# Altium PCB СФ МЭИ ЛБ ПЭ2-18 11.03.04 08.PcbDoc
Units mm, origin at the board's own origin, x right, y up, seen from the top; angles counter-clockwise.
Board outline 57.42 x 32.22 mm, 2 copper layers (Top Layer, Bottom Layer); 20 components, 12 nets, 43 pads, 3 vias.
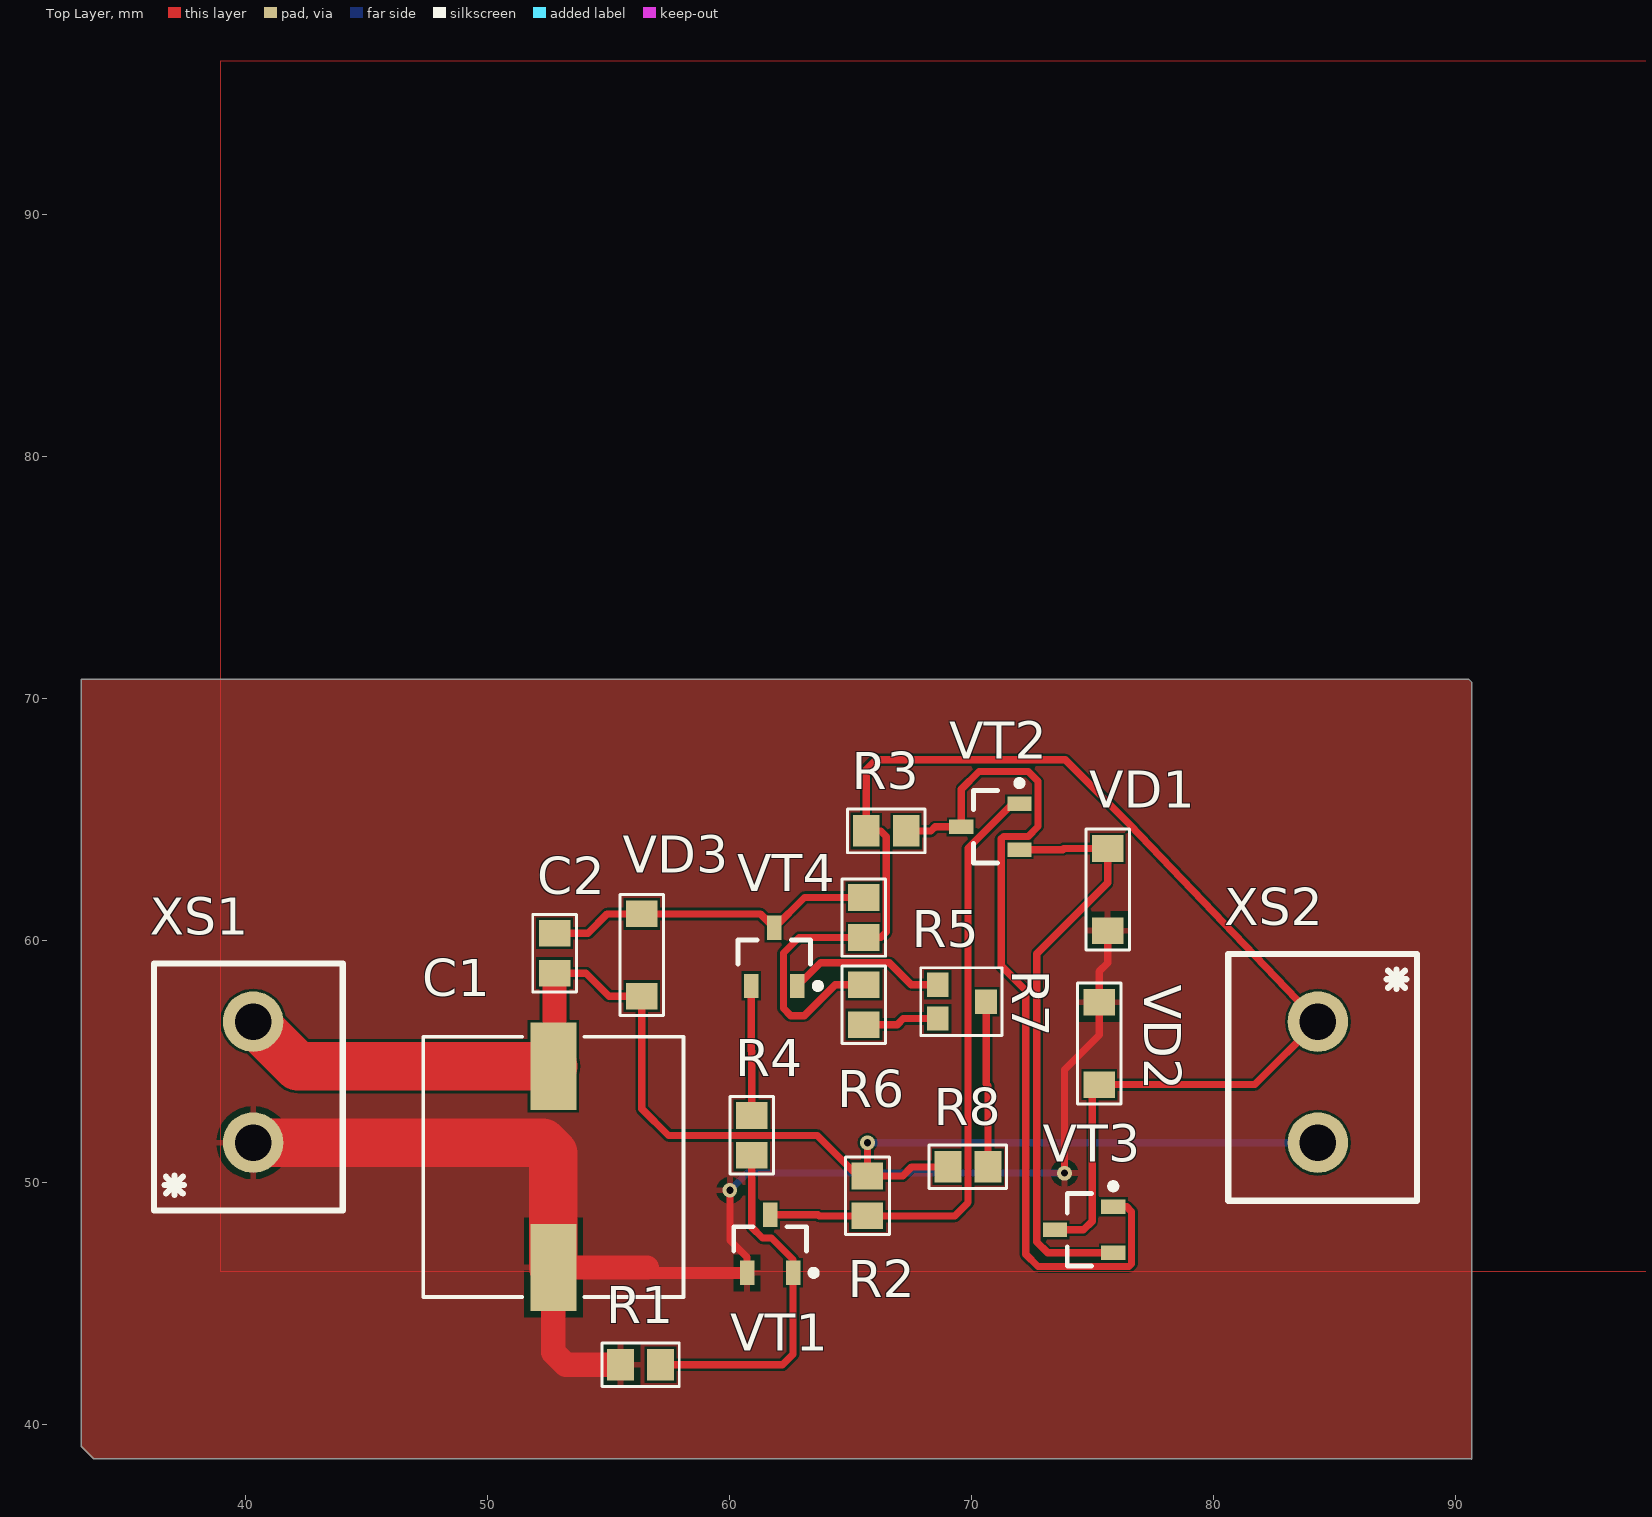
[diagram p0: Top Layer view]
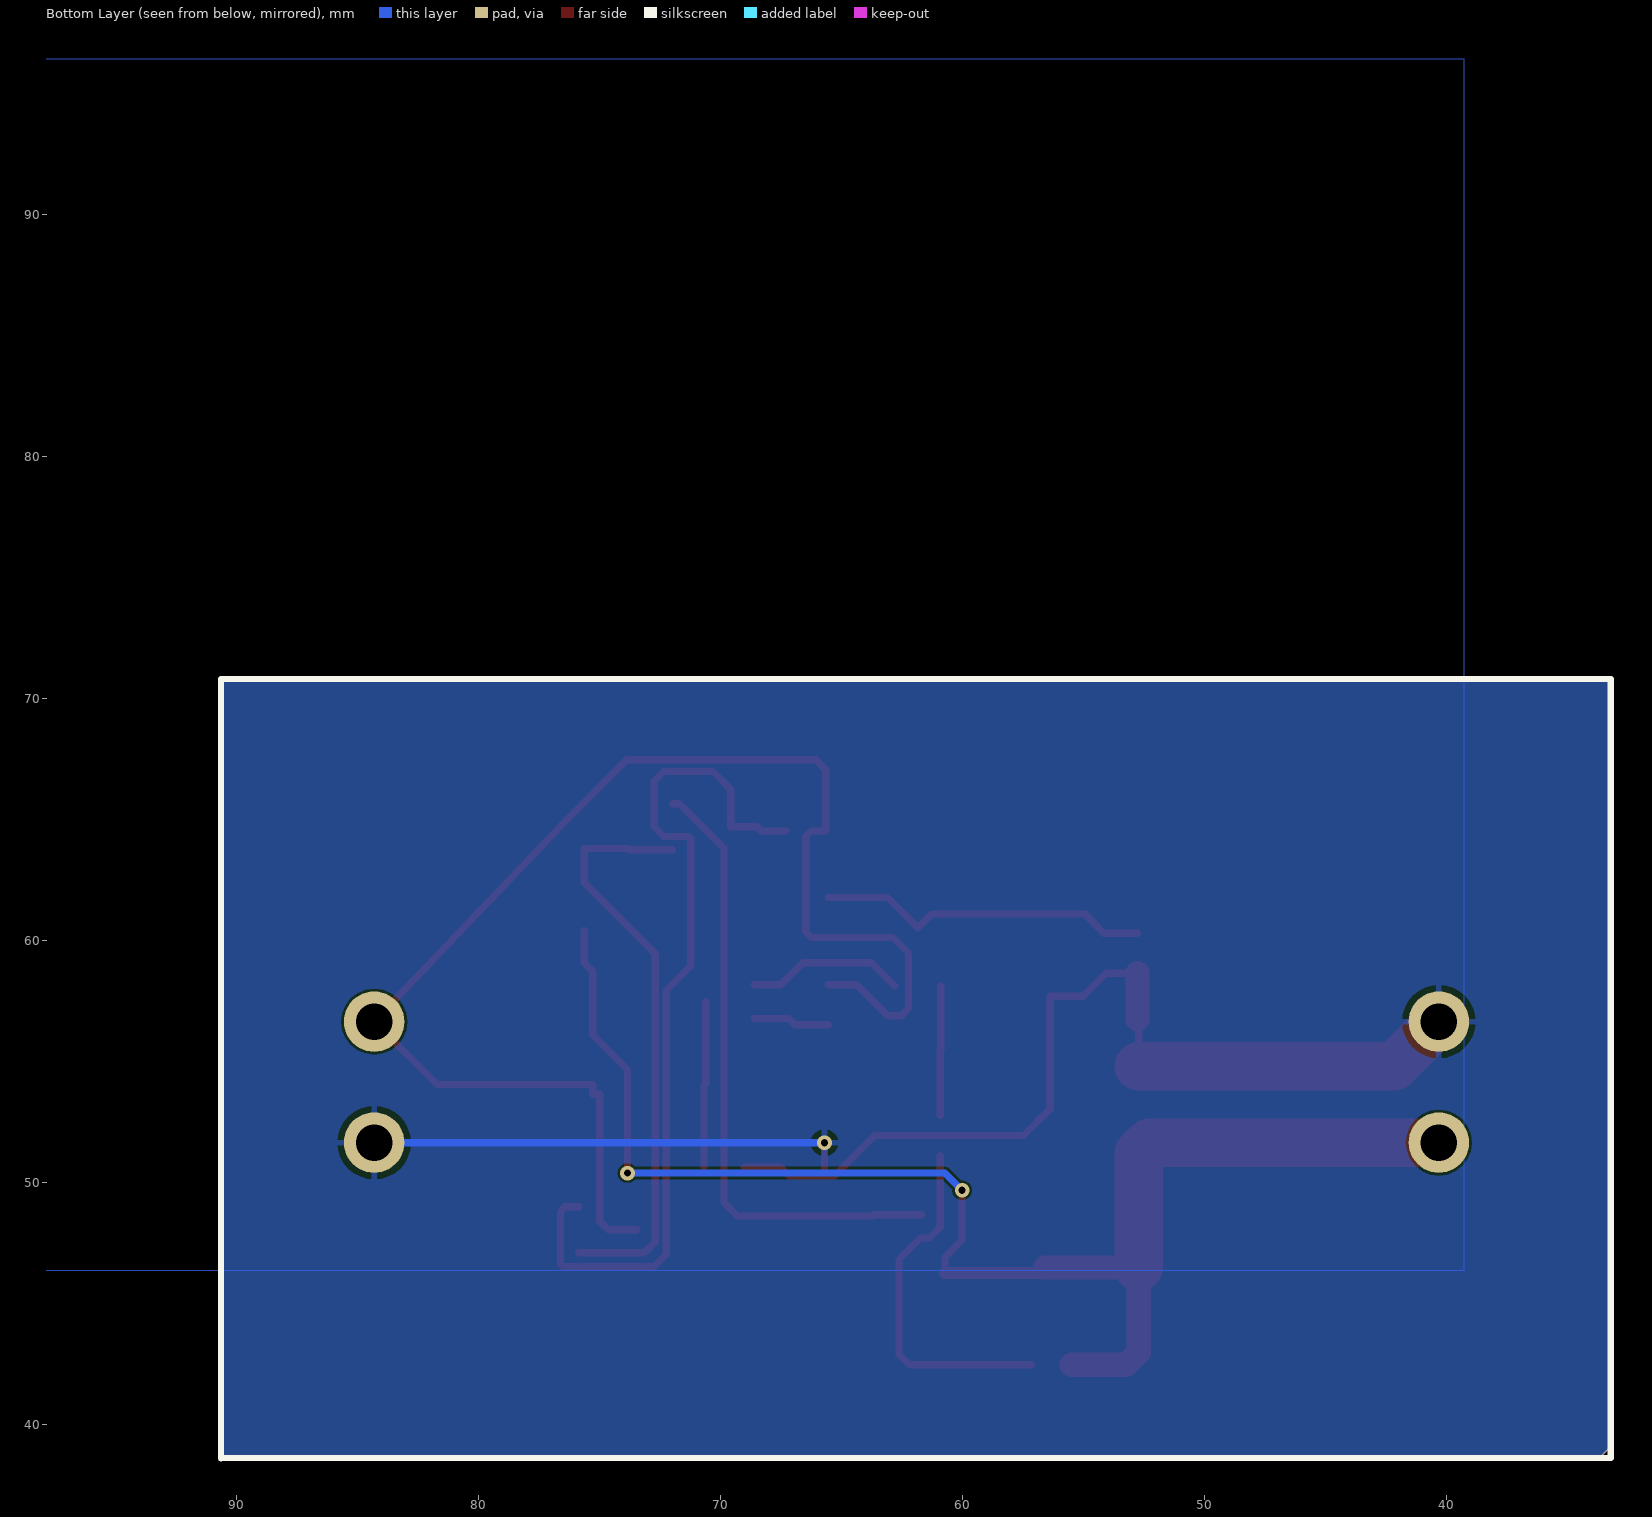
[diagram p1: Bottom Layer view, seen from below]

## Layer stack, top to bottom
Top Solder: solder mask 0.0102, Solder Resist, Dk 3.5
Top Layer: signal copper 0.0356
Dielectric 1: dielectric 0.32, FR-4, Dk 4.8
Bottom Layer: signal copper 0.0356
Bottom Solder: solder mask 0.0102, Solder Resist, Dk 3.5

## Board outline
33.725,38.6 33.225,39.1 33.225,70.8 90.525,70.8 90.65,70.675 90.65,38.575 90.625,38.6

## Design rules (kind name [scope] priority, off if disabled: settings)
Clearance [All] p1: gap=0.1 ignorepadtopadclearanceinfootprint=FALSE except(0: Arc-Hole Track-Hole SMDPad-Hole THPad-Hole Via-Hole Fill-Hole Poly-Hole Region-Hole Text-Hole)
MinimumAnnularRing MinimumAnnularRing_1 [All] p1: minimumring=0.254
MinimumAnnularRing [All] p2: minimumring=0.254
PolygonConnect [All] p1: connectstyle=Relief reliefconductorwidth=0.254 reliefentries=4 polygonreliefangle="90 Angle" airgapwidth=0.254
RoutingVias [All] p1: holewidth=0.3 width=0.6 viastyle="Through Hole" minholewidth=0.4 minwidth=0.6 maxholewidth=0.4 maxwidth=0.6
SolderMaskExpansion [All] p1: expansion=0.102 istentingtop=FALSE
Width [All] p1: maxlimit=2 minlimit=0.4 preferedwidth=1 minimp=50.000000 maximp=50.000000 favimp=50.000000
30 further rules are at their usual default settings.

## Components (designator, comment, footprint, x,y, rotation, side; value= is the part's Value field where it differs from the comment)
C1 "Part Number: 35TZV330M10X10.5" CAP_J-V_10X10P5 52.725,50.65 r90 top value=Value
C2 "0.068u" 0805 52.775,59.475 r90 top
R1 "510" 0805 56.325,42.475 r0 top
R2 "100K" 0805 65.7,49.45 r270 top
R3 "91" 0805 66.475,64.525 r180 top
R4 "10K" 0805 60.925,51.95 r90 top
R5 "30K" 0805 65.55,60.95 r270 top
R6 "56K" 0805 65.55,57.35 r90 top
R7 "6.8K" ST32 69.6,57.875 r180 top
R8 "56K" 0805 69.85,50.65 r0 top
VD1 "MMSZ5235B_1" SOD-123 75.625,62.1 r90 top
VD2 "MMSZ5235B" SOD-123 75.275,55.75 r90 top
VD3 "MMSZ5235B" SOD-123 56.375,59.4 r90 top
VT1 "Биполярный транзистор n-p-n" SOT23 61.675,47.475 r90 top
VT2 "Биполярный транзистор n-p-n" SOT23 70.775,64.7 r180 top
VT3 "Биполярный транзистор n-p-n" SOT23 74.65,48.05 r180 top
VT4 "Биполярный транзистор n-p-n" SOT23 61.85,59.325 r90 top
XS1 "DG126-5.0-0.2P" DG126-5.0-02P 40.325,56.65 r180 top
XS2 "DG126-5.0-0.2P" DG126-5.0-02P 84.3,51.65 r0 top
ZBOAS194492846 "Comment" "BOASVIEWassembly:Вид спереди для сборочного:4:1:0:101" 49.4,2358.3 r0 top

## Footprints (in the part's own frame and the unit in brackets; to place one, negate y for a bottom-side part, rotate by r counter-clockwise, add the part's x,y. Pads: shape width x height; smd on the part's side, far side on the other; paste and mask are expansions set on the pad)
0805 [mm] "Чип (SMD)"
  rect 1.1x1.3 smd: 1(-0.825,0) 2(0.825,0)
  silkscreen extent -1.6,-0.9 1.6,0.9, body extent -1,-0.63 1,0.63, height 0.5
"BOASVIEWassembly:Вид спереди для сборочного:4:1:0:101" [mm]
CAP_J-V_10X10P5 [mil]
  rect 142x75 smd paste+0 mask+0: 1(-163.5,0) 2(163.5,0)
  silkscreen extent -212,-212 211,211, body extent -203,-222 203,222, height 425
DG126-5.0-02P [mm]
  round 2.5 hole 1.5: 1(0,5) 2(0,0)
  silkscreen extent -3.7,-2.4 4.1,7.8, body extent -3.7,-2.42 4.1,7.82, height 9.95
SOD-123 [mm] "(SMD)"
  rect 1.1x1.3 smd: 1(-1.7,0) 2(1.7,0)
  silkscreen extent -2.5,-0.9 2.5,0.9, body extent -2,-0.9 1.85,0.8, height 1.37
SOT23 [mm] "SOT23, 3-Leads, Body 2,92x2,45mm, Pitch 0,95mm, IPC Medium Density"
  rect 1x0.6 smd: 1(-1.2,-0.95) 2(-1.2,0.95) 3(1.2,0)
  silkscreen extent -1.32,-1.92 0.7,1.5, body extent -1.3,-1.52 1.3,1.52, height 1.12
ST32 [mm] "Чип (SMD) поджстроечный"
  rect 0.9x1 smd: 1(-1,0.4) 2(1,1.1) 3(1,-0.3)
  silkscreen extent -1.65,-1 1.7,1.8, body extent -1,-0.63 1,1.53, height 0.5

## Part data
C1: library part 35TZV330M10X10.5, "No Description Available", Built_By=EMA_Cory, Copyright="Copyright (C) 2018 Accelerated Designs. All rights reserved", Manufacturer_Part_Number=35TZV330M10X10.5, RefDes=RefDes, Type=DEV, Vendor="Rubycon Netherlands"
C2: library part "К53-68\"R\"-25В-0.068 мкФ ±10% 0805", "К53-68\"R\"-25В-0.068 мкФ ±10%"
R1 R2 R3 R4 R5 R6 R8: library part "0.125Вт 0805 300 Ом, 5%, Чип резистор (SMD)", "0805-0.125 Вт -300 Ом±5%"
R7: library part "0.125Вт 0805 6.8 кОм, 5%, подстроечный чип резистор (SMD)", "0805-0.125 Вт -6.8 кОм±5%"
VD1: "MMSZ5235B"
VT1 VT2: library part IRFML8244TRPBF_1, "IRFML8244TRPBF"
VT3 VT4: library part IRFML8244TRPBF, "IRFML8244TRPBF"

## Via types
v1: diameter 0.6, hole 0.3, Top Layer to Bottom Layer, 3 vias

## Nets (pads, with @x,y where several pads share a name; then routed paths per layer and width w, separated by ;. In a path a pad name is that pad's centre, name@x,y a point inside that pad or via, vN(x,y) a via of type N, cw(c..) or ccw(c..) an arc to the next point about the centre after c; other vN are vias at no path point)
NetC1_1: C1.1 R1.1 VD1.1 VD2.2 VT1.2 XS1.1 | length 60.4
  Top Layer w0.3: v1(60.02,49.682) 60.02,47.619 60.725,46.914 VT1.2 ; v1(73.838,50.395) 73.838,54.661 75.275,56.098 VD2.2 75.275,58.725 75.625,59.075 VD1.1
  Top Layer w0.5: 56.591,46.497 56.813,46.275 VT1.2
  Top Layer w1: R1.1 53.238,42.475 52.725,42.988 C1.1 56.591,46.497
  Top Layer w2: XS1.1 52.281,51.65 52.725,51.206 C1.1
  Bottom Layer w0.3: v1(60.02,49.682) 60.733,50.395 v1(73.838,50.395)
NetC1_2: C1.2 C2.1 R2.1 R8.1 VD3.1 XS1.2 XS2.2 | length 59.6
  Top Layer w0.3: C1.2 52.725,56.693 52.775,56.743 ; C2.1 54.077,58.65 55.027,57.7 VD3.1 56.375,53.048 57.48,51.943 63.627,51.943 65.295,50.275 R2.1 ; v1(65.7,51.65) R2.1 ; R8.1 67.533,50.65 67.158,50.275 R2.1
  Top Layer w1: 52.775,56.743 C2.1
  Top Layer w2: XS1.2 42.172,54.803 C1.2
  Bottom Layer w0.3: v1(65.7,51.65) XS2.2
NetC2_2: C2.2 R5.1 VD3.2 VT4.3 | length 13.9
  Top Layer w0.3: C2.2 54.153,60.3 54.953,61.1 VD3.2 61.275,61.1 VT4.3 63.1,61.775 R5.1
NetR1_2: R1.2 R4.1 VT1.1 | length 14.8
  Top Layer w0.3: R1.2 62.185,42.475 62.625,42.915 VT1.1 62.625,46.824 61.738,47.711 61.366,47.711 60.925,48.152 R4.1
NetR2_2: R2.2 VT1.3 VT2.1 | length 25.9
  Top Layer w0.3: VT1.3 63.652,48.675 63.702,48.625 R2.2 69.301,48.625 69.85,49.174 69.85,63.812 71.688,65.65 VT2.1
NetR3_1: R3.1 VT2.3 VT3.1 | length 36.3
  Top Layer w0.3: R3.1 68.326,64.525 68.501,64.7 VT2.3 69.575,66.248 70.307,66.98 72.339,66.98 72.746,66.573 72.746,64.706 72.339,64.3 71.323,64.3 71.222,64.198 71.222,58.953 72.238,57.937 72.238,47.041 72.746,46.533 76.505,46.533 76.606,46.634 76.606,48.797 76.403,49 VT3.1
NetR3_2: R3.2 R5.2 R6.2 VD2.1 VT3.3 XS2.1 | length 59.4
  Top Layer w0.3: R6.2 64.373,58.175 63.094,56.896 62.535,56.896 62.23,57.201 62.23,59.487 62.868,60.125 R5.2 66.246,60.125 66.472,60.35 66.472,64.296 66.243,64.525 R3.2 65.65,67.056 66.056,67.462 73.863,67.462 76.53,64.795 XS2.1 81.7,54.05 VD2.1 75.275,53.65 74.981,53.65 74.981,48.407 74.624,48.05 VT3.3
NetR4_2: R4.2 VT4.2 | length 5.4
  Top Layer w0.3: VT4.2 60.9,55.448 60.925,55.423 R4.2
NetR6_1: R6.1 R7.2 | length 3.2
  Top Layer w0.3: R6.1 66.929,56.525 67.179,56.775 R7.2
NetR7_1: R7.1 R8.2 | length 6.9
  Top Layer w0.3: R7.1 70.6,54.075 70.675,54 R8.2
NetR7_3: R7.3 VT4.1 | length 6.6
  Top Layer w0.3: VT4.1 63.755,59.08 66.599,59.08 67.504,58.175 R7.3
NetVD1_2: VD1.2 VT2.2 VT3.2 | length 24.5
  Top Layer w0.3: VT2.2 73.762,63.75 73.812,63.8 VD1.2 75.625,62.382 72.695,59.452 72.695,47.549 73.144,47.1 VT3.2

## Polygon pours and split planes (outlines as drawn)
NetC1_2 on Bottom Layer "NONET_L01_P-001" (solid, pour order 17): 33.25,70.775 33.225,70.75 33.225,39.075 33.7,38.6 90.625,38.6 90.625,70.675 90.525,70.775
no net on Bottom Layer "GND A" (solid, shelved, pour order 7): 39.275,46.375 39.275,96.4 142.075,96.4 142.075,46.375
NetC1_1 on Top Layer "NONET_L01_P-001" (solid, pour order 16): 33.25,70.775 33.225,70.75 33.225,39.075 33.7,38.6 90.625,38.6 90.625,70.675 90.525,70.775
no net on Top Layer "GND A" (solid, shelved, pour order 6): 38.981,46.316 38.981,96.341 141.781,96.341 141.781,46.316
no net on Top Overlay "NONET_L01_P-001" (solid): 39.325,73.95

## Silkscreen, mask and mechanical layers (free items; w line width, h text height)
Bottom Overlay:
  lines w0.254: 90.625,70.8 33.225,70.8 33.225,38.625 90.6,38.625 90.625,38.6 90.625,70.8 ; 90.625,70.8 90.625,70.8
Mechanical 7:
  text "BOASFORMAT|А3|101|0|883070867|165354330|1000000000|4:1|" at 0,2540 h0
  text "DimPos|57431102|946407480|-11564961|-10413386|10|2286542" at 175.25,2430.325 h0
  text "DimPos|23228346|948080709|6811023|-8612204|2|1772217" at 41.7,2430 h0
  text "DimPos|43671260|948720472|8228347|-7844489|7|1416598" at 90.025,2429.675 h0
  text "DimPos|51387795|948208661|7204724|-8100394|5|1742827" at 112.225,2429.025 h0
  text "DimPos|73238189|940748031|-14271654|-12992126|2|1772217" at 222.275,2422.5 h0
  text "DimLitera|40049213|939192913|12805119|14389763|1|||1||0|0|False" at 69.2,2349 h0
  text "DimLitera|74438976|930442913|-10570867|6299212|1|||1||0|0|False" at 215.925,2347.325 h0
  text "DimPos|57559055|938690945|-14399606|14655512|6|1454805" at 182.775,2347.05 h0
  text "DimLitera|56269685|934576772|-5659449|11564961|1|||1||0|0|False" at 157.3,2344.45 h0
  text "DimPos|49714567|934064961|1801181|11702756|4|1178539" at 121.7,2342.8 h0
  text "DimPos|56259843|934458661|-7224409|12322834|9|1454805" at 161.25,2342.225 h0
  text "DimLitera|41377953|933887795|5767717|12125984|1|||3||0|0|False" at 90.45,2341.275 h0
  text "DimLitera|53307087|939458661|-2440944|20629921|1|||13||0|0|False" at 141.6,2333.825 h0
  text "DimPos|47933071|940442913|7627953|23661417|8|1584121" at 102.375,2328.625 h0
  text "SET2|Superlayer=MechanicalLayer7|Wsuperlayer=MechanicalLayer8|Layergrid=MechanicalLayer9|Werase=MechanicalLayer11|Layermark=MechanicalLayer12|Layerstamp=MechanicalLayer13|Thinline=0,18|Basicline=0,6|Gridline=0,18|Boardline=0,6|Contourpolygonline=0,6|PcbGridStep=1,25|PcbGridCleareanceAtView=0|PcbGridNumberEach=l4|PcbGridLineEach=l2|PcbGridCountSecondaryStrip=1|PcbGridEnabledStrip=True|PcbSignalGridEnabled=True|PcbSignalShowBukva=True|RealSignalLayerNames=False|PcbGridEnabledBothSide=False|RealLayerNames=False|SilkShowPad=True|SilkViewName=Слой маркировки|SilkShowHole=True|SilkShowAxis=True|SilkShowBukva=True|SilkShowGrid=False|SolderShowGrid=False|SolderViewName=Слой маски|SolderShowAxis=False|SolderShowBukva=False|MainViewShowGrid=False|MainViewUseShapesDrill=False|ShowBukvaOnSboky=True|Density=2,2|TableName=Таблица 1|RazrezWidth=100|Sher=Rz 160|Asstoplayer=TopOverlay|Asstoplayer2=MechanicalLayer15|Assbottomlayer=MechanicalLayer2|Assbottomlayer2=MechanicalLayer15|AssMinDiameterHoles=2|AssDim=False|AssMech=True|AssSilk=False|AssComponentSilk=False|AssFreeSilk=False|AssSmdPads=False|AssGridEnable=False|Mirror=Horisontal|PcbGridFontSize=5|PcbGridCenterZero=False|TTStampDistance=12|MainFontSize=5|PolyStep=2|PcbDrillDrawingGridEnabled=False|PcbDrillDrawingViewName=Слой сверловки|PcbDrillDrawingShowBukva=False|PcbDrillDrawingShowAxis=False|PcbSignalLayersUseDrill=False|PcbSignalLayersUseShapesDrill=False|PcbSignalLayersShowAxis=False" at 0,0.025 h0
  text "2TT0008# 9.Радиатор прикрепить при помощи клей теплопроводный Радиал" at 0,0 h0
  text "2TT0007#  8 Клеймить." at 0,0 h0
  text "2TT0006#  7 Маркировать обозначение и заводской номер печатного узла черной краской МКЭ ОСТ 4ГО.054.2050М2 шрифтом 3,5 или 5 тип А ГОСТ 2.304-81, вместе, удобном для чтения." at 0,0 h0
  text "2TT0005#  6 Покрытие лак УР-231 ТУ6-21-14-90(3). Допускается покрытие лаком ЭП-730 ГОСТ 20824-81(3)." at 0,0 h0
  text "2TT0004#  5 Элементы поверхностного монтажа паять припойной пастой ПОС-61 ЛОК ТУ 400 К''Р''-1805-22-91, флюс ФПС-3 ТУ400 СП \"ЭВ\"-2178-137-98." at 0,0 h0
  text "2TT0003#  4 Меры защиты от статического электричества по ОСТ 92-1615-74. Степень жесткости II по ОСТ11.073.062-2001." at 0,0 h0
  text "2TT0002#  3** Размеры обеспеч. инстр." at 0,0 h0
  text "2TT0001#  2* Размеры для справок." at 0,0 h0
  text "2TT0000#  1 Установку элементов производить по чертежу." at 0,0 h0
  text "TT0005#" at 0,0 h0
  text "TT0004#  5 Конфигурацию печатных проводников выдерживать по координатной сетке с отклонениями от чертежа ±1,5 мм." at 0,0 h0
  text "TT0003#  4 Шаг координатной сетки 1,25 мм. Линии сетки нанесены через одну." at 0,0 h0
  text "TT0002#  3 Печатная плата должна соответствовать ГОСТ Р 53429-2009, группе жесткости 3 при верхнем значении температуры окружающей среды (85±2) °С." at 0,0 h0
  text "TT0001#  2 Класс точности 3 по ГОСТ Р 53429-2009." at 0,0 h0
  text "TT0000#  1 *  Размер для справок." at 0,0 h0
  text "STAMP|Наименование1|Стабилизатор" at 0,0 h0
  text "STAMP|Наименование2|напряжения" at 0,0 h0
  text "STAMP|Обозначение|СФ МЭИ ЛБ ПЭ2-18 11.03.04 03" at 0,0 h0
  text "STAMP|Масса|120 г" at 0,0 h0
  text "STAMP|Разработал|Гончаренко В.Ю." at 0,0 h0
  text "STAMP|Проверил|Смолин В.А." at 0,0 h0
  text "STAMP|Утвердил|Рассказа Д.С." at 0,0 h0
  text "STAMP|Var|Нач. отд." at 0,0 h0
  text "STAMP|Tech|Т.контр." at 0,0 h0
  text "STAMP|Normo|Н.контр." at 0,0 h0
  text "STAMP|Check|Пров." at 0,0 h0
  text "STAMP|Design|Разраб." at 0,0 h0
  text "STAMP|Utv|Утв." at 0,0 h0
  text "STAMP|Первичная применяемость|СФ МЭИ ЛБ ПЭ2-18 11.03.04 03" at 0,0 h0
  text "STAMP|Организация|НИУ СФ МЭИ ПЭ2-18" at 0,0 h0
  text "2STAMP|Организация|НИУ СФ МЭИ ПЭ2-18" at 0,0 h0
  text "2STAMP|Масса|120 г" at 0,0 h0
  text "2STAMP|Первичная применяемость|СФ МЭИ ЛБ ПЭ2-18 11.03.04 03" at 0,0 h0
  text "2STAMP|Наименование1|Стабилизатор" at 0,0 h0
  text "2STAMP|ТипДокумента|Сборочный чертёж" at 0,0 h0
  text "2STAMP|Наименование2|напряжения" at 0,0 h0
  text "2STAMP|Разработал|Гончаренко В.Ю." at 0,0 h0
  text "2STAMP|Проверил|Смолин В.А." at 0,0 h0
  text "2STAMP|Утвердил|Рассказа Д.С." at 0,0 h0
  text "2STAMP|Var|Нач. отд." at 0,0 h0
  text "2STAMP|Tech|Т.контр." at 0,0 h0
  text "2STAMP|Normo|Н.контр." at 0,0 h0
  text "2STAMP|Check|Пров." at 0,0 h0
  text "2STAMP|Design|Разраб." at 0,0 h0
  text "2STAMP|Utv|Утв." at 0,0 h0
  text "2STAMP|Обозначение|СФ МЭИ ЛБ ПЭ2-18 11.03.04 03 СБ" at 0,0 h0
  text "BOASVIADRILLTABLE:bigquare,78740,2," at 0,0 h0
  text "2BOASDRILLTABLE:triangle,590551,Да,4,True," at 0,0 h0
Mechanical 9:
  circle w0.6: c135.4,2386.225 r0.2
  circle w0.6: c121.75,2388.725 r0.2
  circle w0.6: c105.1,2372.075 r0.2
  circle w0.6: c101.725,2385.55 r0.2
  circle w0.6: c142.9,2373.525 r0.2
  circle w0.6: c189.075,2363.325 r0.2
  circle w0.6: c126.275,2372.525 r0.2
  circle w0.6: c146.2,2384.275 r0.2
  circle w0.6: c142.925,2373.825 r0.2
  circle w0.6: c59,2408.125 r0.2
  circle w0.6: c110.925,2409.75 r0.2
  circle w0.6: c130.525,2408.45 r0.2
  circle w0.6: c145.875,2403.875 r0.2
  circle w0.6: c186.025,2389.5 r0.2
  lines w0.18: 32.199,2430 41.7,2430 59,2408.125 ; 62.553,2349 69.2,2349 101.725,2385.55 ; 81.427,2429.675 90.025,2429.675 110.925,2409.75 ; 82.662,2341.275 90.45,2341.275 105.1,2372.075 ; 93.351,2328.625 102.375,2328.625 121.75,2388.725 ; 102.798,2429.025 112.225,2429.025 130.525,2408.45 ; 113.707,2342.8 121.7,2342.8 126.275,2372.525 ; 135.4,2386.225 141.6,2333.825 150.289,2333.825 ; 142.9,2373.525 161.25,2342.225 169.945,2342.225 ; 145.875,2403.875 175.25,2430.325 186.058,2430.325 ; 146.2,2384.275 182.775,2347.05 191.47,2347.05 ; 186.025,2389.5 222.275,2422.5 231.776,2422.5 ; 189.075,2363.325 215.925,2347.325 222.572,2347.325
  text "10" at 177.75,2432.855 h10.75
  text "2" at 34.699,2432.53 h10.75
  text "7" at 83.927,2432.205 h10.75
  text "5" at 105.298,2431.555 h10.75
  text "2" at 224.775,2425.03 h10.75
  text "1" at 65.053,2351.53 h7.68
  text "1" at 218.425,2349.855 h7.68
  text "6" at 185.275,2349.58 h10.75
  text "4" at 116.207,2345.33 h10.75
  text "9" at 163.75,2344.755 h10.75
  text "3" at 85.162,2343.805 h7.68
  text "13" at 144.1,2336.355 h7.68
  text "8" at 95.851,2331.155 h10.75
Mechanical 13:
  lines w0.18: 230,2253 295,2253 ; 230,2258 295,2258 ; 230,2263 295,2263 ; 230,2268 295,2268 ; 230,2273 295,2273 ; 230,2288 295,2288 ; 230,2293 295,2293 ; 230,2298 295,2298 ; 369.96,2268 369.96,2283 ; 374.98,2268 374.98,2283
  lines w0.6: 8,2273 20,2273 ; 8,2308 20,2308 ; 8,2333 20,2333 ; 8,2358 20,2358 ; 8,2475 20,2475 ; 13,2248 13,2393 ; 13,2415 13,2535 ; 20,2393 8,2393 8,2248 20,2248 ; 20,2415 8,2415 8,2535 20,2535 ; 20,2521 90,2521 90,2535 ; 230,2248 230,2303 415,2303 ; 230,2278 295,2278 ; 230,2283 295,2283 ; 237,2278 237,2303 ; 247,2248 247,2303 ; 270,2248 270,2303 ; 285,2248 285,2303 ; 295,2248 295,2303 415,2303 ; 295,2263 365,2263 415,2263 ; 295,2288 415,2288 ; 365,2248 365,2288 ; 365,2268 415,2268 ; 365,2283 380,2283 415,2283 ; 380,2268 380,2288 ; 385.57,2263 385.57,2268 ; 397,2268 397,2288 ; 415,2311 415,2303 ; 20,2248 415,2248 415,2535 20,2535 ; 20,2248 20,2535
  text "СФ МЭИ ЛБ ПЭ2-18 11.03.04 03 СБ" at 89.503,2530.018 h7.35 r180
  text "Перв. примен." at 11.976,2494.373 h5.38 r90
  text "СФ МЭИ ЛБ ПЭ2-18 11.03.04 03" at 17.976,2481.911 h5.38 r90
  text "Справ. №" at 11.976,2437.78 h5.38 r90
  text "Подп. и дата" at 11.976,2365.961 h5.38 r90
  text "Инв. № дубл." at 11.976,2336.457 h5.38 r90
  text "1 Установку элементов производить по чертежу. /   2* Размеры для справок. /   3** Размеры обеспеч. инстр. /   4 Меры защиты от статического электричества по ОСТ 92-1615-74. Степень жесткости II по ОСТ11.073.062-2001. /   5 Элементы поверхностного монтажа паять припойной пастой ПОС-61 ЛОК ТУ 400 К''Р''-1805-22-91, флюс ФПС-3 ТУ400 СП \"ЭВ\"-2178-137-98.  /   6 Покрытие лак УР-231 ТУ6-21-14-90(3). Допускается покрытие лаком ЭП-730 ГОСТ 20824-81(3). /   7 Маркировать обозначение и заводской номер печатного узла черной краской МКЭ ОСТ 4ГО.054.2050М2 шрифтом 3,5 или 5 тип А ГОСТ 2.304-81, вместе, удобном для чтения. /   8 Клеймить. /  9.Радиатор прикрепить при помощи клей теплопроводный Радиал" at 235,2323 h7.68
  text "Взам. инв. №" at 11.976,2311.496 h5.38 r90
  text "СФ МЭИ ЛБ ПЭ2-18 11.03.04 03 СБ" at 318.951,2293.391 h7.68
  text "Лит." at 369.328,2284.024 h5.38
  text "Масса" at 384.108,2284.024 h5.38
  text "Масштаб" at 399.133,2284.024 h5.38
  text "Подп. и дата" at 11.976,2282.461 h5.38 r90
  text "Стабилизатор" at 314.675,2280.891 h7.68
  text "Изм." at 230.687,2279.024 h5.38
  text "Лист" at 238.024,2279.024 h5.38
  text "№ докум." at 252.271,2279.024 h5.38
  text "Подп." at 273.92,2279.024 h5.38
  text "Дата" at 285.963,2279.024 h5.38
  text "Разраб." at 230.533,2273.771 h5.38
  text "Гончаренко В.Ю." at 247.68,2273.771 h5.14
  text "120 г" at 383.233,2273.391 h7.68
  text "4:1" at 403.065,2273.391 h7.68
  text "напряжения" at 317.479,2272.891 h7.68
  text "Пров." at 230.533,2268.771 h5.38
  text "Смолин В.А." at 247.68,2268.771 h5.38
  text "Сборочный чертёж" at 316.094,2265.524 h5.38
  text "Т.контр." at 230.533,2263.771 h5.38
  text "Лист" at 366.442,2263.771 h5.38
  text "Листов" at 387.485,2263.771 h5.38
  text "1" at 407.424,2263.771 h5.38
  text "Нач. отд." at 230.533,2258.771 h5.38
  text "Н.контр." at 230.533,2253.771 h5.38
  text "НИУ СФ МЭИ ПЭ2-18" at 368.285,2253.391 h7.68
  text "Инв. № подл." at 11.976,2251.457 h5.38 r90
  text "Утв." at 230.533,2248.771 h5.38
  text "Рассказа Д.С." at 247.68,2248.771 h5.38
  text "Копировал" at 305.533,2243.771 h5.38
  text "Формат А3" at 386.625,2243.771 h5.38

## Dimensions
90.6,38.625 to 90.625,70.8 on Bottom Overlay
33.225,38.625 to 90.6,38.625 on Bottom Overlay

## Text inside footprints (layer, text, board x,y; h text height)
ZBOAS194492846: Mechanical 12 "R3" at 98.057,2382.231 h6.1 r90; Mechanical 12 "C1" at 151.863,2391.872 h6.1 r270; Mechanical 12 "DA1" at 120.444,2383.21 h4; Mechanical 12 "VT1" at 88.1,2412.163 h6.1; Mechanical 12 "C2" at 120.631,2361.962 h6.1; Mechanical 12 "XS2" at 163.384,2389.463 h6.1; Mechanical 12 "C3" at 127.431,2412.463 h6.1; Mechanical 12 "R2" at 143.63,2412.223 h6.1; Mechanical 12 "R1" at 138.947,2362.263 h6.1; Mechanical 12 "C4" at 109.931,2412.463 h6.1; Mechanical 12 "VD1" at 95.5,2361.463 h6.1; Mechanical 12 "XS1" at 67.8,2389.663 h6.1